# EAGLE board CT_schematic (EAGLE 7.6.0)

Size 100 x 80 mm. Coordinates in mm from the lower left corner, seen from the top.
Outline: 0,0 100,0 100,80 0,80 0,0
Copper layers (1*16): Top 0.035mm / dielectric 1.5mm / Bottom 0.035mm
Design rules "default": minimum track width 10mil, minimum drill 24mil, track to track 8mil, track to pad 8mil, pad to pad 8mil, via to via 8mil, smd to smd 8mil, copper to edge 40mil, drill to drill 8mil, minimum pad ring 10mil, minimum via ring 8mil, stop-mask expansion 4mil, vias tented up to drill 0mil, thermal gap 10mil

## Footprints (pad centres in the part's own frame; a part is rotated, then mirrored left to right if it is on the bottom)
C0603 = smd 0.8 x 0.8: 1 -0.762,0; 2 0.762,0
C0402 = smd 0.5 x 0.5: 1 -0.508,0; 2 0.508,0
C1210 = smd 1.2 x 2.5: 1 -1.524,0; 2 1.524,0
EXV-9H = smd 3.505 x 1.676: 1 -2.857,0; 2 2.857,0
L0603 = smd 0.8 x 0.8: 1 -0.762,0; 2 0.762,0
PJ-037B_PACKAGE = drill 3.7 square: 1 12,0 | drill 3.2 square: 2 6,0
R0603 = smd 0.8 x 0.8: 1 -0.762,0; 2 0.762,0
WLCSP64 = smd 0.34 x 0.34: A1 -1.75,1.75; A2 -1.25,1.75; A3 -0.75,1.75; A4 -0.25,1.75; A5 0.25,1.75; A6 0.75,1.75; A7 1.25,1.75; A8 1.75,1.75; B1 -1.75,1.25; B2 -1.25,1.25; B3 -0.75,1.25; B4 -0.25,1.25; B5 0.25,1.25; B6 0.75,1.25; B7 1.25,1.25; B8 1.75,1.25; C1 -1.75,0.75; C2 -1.25,0.75; C3 -0.75,0.75; C4 -0.25,0.75; C5 0.25,0.75; C6 0.75,0.75; C7 1.25,0.75; C8 1.75,0.75; D1 -1.75,0.25; D2 -1.25,0.25; D3 -0.75,0.25; D4 -0.25,0.25; D5 0.25,0.25; D6 0.75,0.25; D7 1.25,0.25; D8 1.75,0.25; E1 -1.75,-0.25; E2 -1.25,-0.25; E3 -0.75,-0.25; E4 -0.25,-0.25; E5 0.25,-0.25; E6 0.75,-0.25; E7 1.25,-0.25; E8 1.75,-0.25; F1 -1.75,-0.75; F2 -1.25,-0.75; F3 -0.75,-0.75; F4 -0.25,-0.75; F5 0.25,-0.75; F6 0.75,-0.75; F7 1.25,-0.75; F8 1.75,-0.75; G1 -1.75,-1.25; G2 -1.25,-1.25; G3 -0.75,-1.25; G4 -0.25,-1.25; G5 0.25,-1.25; G6 0.75,-1.25; G7 1.25,-1.25; G8 1.75,-1.25; H1 -1.75,-1.75; H2 -1.25,-1.75; H3 -0.75,-1.75; H4 -0.25,-1.75; H5 0.25,-1.75; H6 0.75,-1.75; H7 1.25,-1.75; H8 1.75,-1.75
SOIC-8 = smd 1.6 x 0.6: 1 -2.7,1.905 | smd 1.55 x 0.6: 2 -2.7,0.635; 3 -2.7,-0.635; 4 -2.7,-1.905; 5 2.7,-1.905; 6 2.7,-0.635; 7 2.7,0.635; 8 2.7,1.905
SAMTEC_FTSH-105-01-L-DV-K = smd 0.762 x 2.794: 1 -2.54,-2.032; 2 -2.54,2.032; 3 -1.27,-2.032; 4 -1.27,2.032; 5 0,-2.032; 6 0,2.032; 7 1.27,-2.032; 8 1.27,2.032; 9 2.54,-2.032; 10 2.54,2.032
TDFN-8/6MM = smd 0.3 x 0.75: 1 0,0; 2 0.5,0; 3 1,0; 4 1.5,0; 5 1.5,3; 6 1,3; 7 0.5,3; 8 0,3
FCI_10118193-0001LF = smd 0.4 x 1.35: 1 -1.3,2.675; 2 -0.65,2.675; 3 0,2.675; 4 0.65,2.675; 5 1.3,2.675 | smd 1.6 x 1.4: 6 -3.2,2.45; 7 3.2,2.45 | smd 1.9 x 1.9: 8 -1.2,0; 9 1.2,0 | hole 0.5: -3.3,0; 3.3,0
SOT143B = smd 1 x 0.7: 1 -0.75,-1 | smd 0.6 x 0.7: 2 0.95,-1; 3 0.95,1; 4 -0.95,1
ABS07-32.768KHZ-7-T = smd 1.1 x 2.4: 1 -2.5,0; 2 0,0
ASFL1 = smd 1.7 x 1.5: 1 -1.27,-1.1; 2 1.27,-1.1; 3 1.27,1.1; 4 -1.27,1.1
SOIC-8_EP = smd 1.6 x 0.533: 1 -2.921,1.905; 2 -2.921,0.635; 3 -2.921,-0.635; 4 -2.921,-1.905; 5 2.921,-1.905; 6 2.921,-0.635; 7 2.921,0.635; 8 2.921,1.905 | smd 2.54 x 3.302: EPAD 0,0 | drill 0.406 pad 0.406: P$1 -0.508,0.635; P$2 0.381,0.635; P$3 -0.508,-0.635; P$4 0.381,-0.635
SON-6 = smd 0.55 x 0.3: 1 -0.355,0.5 | smd 0.52 x 0.3: 2 -0.37,0; 3 -0.37,-0.5; 4 0.37,-0.5; 5 0.37,0; 6 0.37,0.5
SW_4-1437565-2 = smd 1.4 x 2.1: 1 -2.23,4.55; 2 -2.23,-4.55; 3 2.23,4.55; 4 2.23,-4.55
LGM67K-G1J2-24-Z = smd 0.8 x 1.4: A -2,0; C 0,0
NC7SZ125M5X = smd 1.3 x 0.7: 1 -1.3,0.95; 2 -1.3,0; 3 -1.3,-0.95; 4 1.3,-0.95; 5 1.3,0.95

## Placement (x,y rotation side)
C1  1e-06  [C0603]  -19.05,57.15 0 top  (outside the outline)
C2  1e-07  [C0603]  -22.86,57.15 0 top  (outside the outline)
C3  1e-07  [C0603]  -26.67,57.15 0 top  (outside the outline)
C4  1e-07  [C0603]  -30.48,57.15 0 top  (outside the outline)
C5  1e-07  [C0603]  -34.29,57.15 0 top  (outside the outline)
C6  1e-07  [C0603]  -38.1,57.15 0 top  (outside the outline)
C7  4.7e-06  [C0603]  -64.77,52.07 0 top  (outside the outline)
C8  2.2e-06  [C0603]  -15.24,57.15 0 top  (outside the outline)
C9  1e-08  [C0603]  -41.91,57.15 0 top  (outside the outline)
C10  1e-06  [C0603]  -45.72,57.15 0 top  (outside the outline)
C11  1e-11  [C0402]  -30.48,62.23 0 top  (outside the outline)
C12  1e-11  [C0402]  -34.29,62.23 0 top  (outside the outline)
C13  1e-06  [C0603]  -49.53,57.15 0 top  (outside the outline)
C14  1e-08  [C0402]  -38.1,62.23 0 top  (outside the outline)
C15  1e-07  [C0402]  -41.91,62.23 0 top  (outside the outline)
C16  1e-08  [C0402]  -45.72,62.23 0 top  (outside the outline)
C17  1e-08  [C0402]  -49.53,62.23 0 top  (outside the outline)
C18  1e-05  [C1210]  -16.51,46.99 0 top  (outside the outline)
C19  1e-05  [C1210]  -22.86,46.99 0 top  (outside the outline)
C20  1e-05  [C1210]  -29.21,46.99 0 top  (outside the outline)
C21  1e-05  [C1210]  -35.56,46.99 0 top  (outside the outline)
C22  1e-07  [C0402]  -53.34,62.23 0 top  (outside the outline)
C23  0.0001  [EXV-9H]  -60.96,30.48 0 top  (outside the outline)
C24  0.0001  [EXV-9H]  -17.78,39.37 0 top  (outside the outline)
C25  1e-08  [C0402]  -57.15,62.23 0 top  (outside the outline)
C26  1e-08  [C0402]  -60.96,62.23 0 top  (outside the outline)
F1  240.0  [L0603]  -53.34,57.15 0 top  (outside the outline)
J1  PJ-037B  [PJ-037B_PACKAGE]  -57.15,7.62 0 top  (outside the outline)
R2  1000.0  [R0603]  -57.15,57.15 0 top  (outside the outline)
R4  4700.0  [R0603]  -60.96,57.15 0 top  (outside the outline)
R5  2200.0  [R0603]  -64.77,57.15 0 top  (outside the outline)
R6  2200.0  [R0603]  -15.24,62.23 0 top  (outside the outline)
R7  10000.0  [R0603]  -15.24,52.07 0 top  (outside the outline)
R8  10000.0  [R0603]  -20.32,52.07 0 top  (outside the outline)
R9  10000.0  [R0603]  -25.4,52.07 0 top  (outside the outline)
R10  10000.0  [R0603]  -30.48,52.07 0 top  (outside the outline)
R11  10000.0  [R0603]  -35.56,52.07 0 top  (outside the outline)
R12  10000.0  [R0603]  -40.64,52.07 0 top  (outside the outline)
R13  10000.0  [R0603]  -45.72,52.07 0 top  (outside the outline)
R14  10000.0  [R0603]  -50.8,52.07 0 top  (outside the outline)
R15  5.0  [R0603]  -19.05,62.23 0 top  (outside the outline)
R16  4031.5447154472  [R0603]  -57.15,45.72 0 top  (outside the outline)
R17  2200.0  [R0603]  -22.86,62.23 0 top  (outside the outline)
R18  10000.0  [R0603]  -55.88,52.07 0 top  (outside the outline)
R19  10000.0  [R0603]  -60.96,52.07 0 top  (outside the outline)
R20  9100.0  [R0603]  -26.67,62.23 0 top  (outside the outline)
R21  680000.0  [R0603]  -62.23,45.72 0 top  (outside the outline)
R22  120000.0  [R0603]  -67.31,45.72 0 top  (outside the outline)
U1  STM32F412RGY6  [WLCSP64]  -41.91,30.48 0 top  (outside the outline)
U2  AT25320B-SSHL-T  [SOIC-8]  -57.15,19.05 0 top  (outside the outline)
U3  FTSH-105-01-L-DV-K  [SAMTEC_FTSH-105-01-L-DV-K]  -35.56,7.62 0 top  (outside the outline)
U4  24AA04-I/MC  [TDFN-8/6MM]  -41.91,19.05 0 top  (outside the outline)
U5  10118193-0001LF  [FCI_10118193-0001LF]  -50.8,30.48 0 top  (outside the outline)
U6  prtr5v0u2ax  [SOT143B]  -24.13,67.31 0 top  (outside the outline)
U7  ABS07-32.768KHZ-7-T  [ABS07-32.768KHZ-7-T]  -39.37,39.37 0 top  (outside the outline)
U8  ASFL1-25MHZ-NCS  [ASFL1]  -26.67,30.48 0 top  (outside the outline)
U9  MIC5234YME  [SOIC-8_EP]  -48.26,39.37 0 top  (outside the outline)
U10  TPS3895ADRYR  [SON-6]  -27.94,66.04 0 top  (outside the outline)
U11  4-1437565-2  [SW_4-1437565-2]  -27.94,20.32 0 top  (outside the outline)
U12  Q65110A2395  [LGM67K-G1J2-24-Z]  -57.15,39.37 0 top  (outside the outline)
U13  nc7sz125m5x  [NC7SZ125M5X]  -40.64,45.72 0 top  (outside the outline)
U14  nc7sz125m5x  [NC7SZ125M5X]  -46.99,45.72 0 top  (outside the outline)

## Library data of the parts
C1-C26 F1 J1 R2 R4-R22 U1-U14 = circuit_tree

## Nets
CLK_CRYSTAL_U1_C7: C11.1 U1.C7 U7.1
CLK_CRYSTAL_U1_C8: C12.1 U1.C8 U7.2
CLK_U1_D8: U1.D8 U8.3
GND: C1.2 C2.2 C3.2 C4.2 C5.2 C6.2 C7.2 C8.2 C9.2 C10.2 C11.2 C12.2 C13.2 C14.2 C15.2 C16.2 C17.2 C18.2 C19.2 C20.2 C21.2 C22.2 C23.2 C24.2 C25.2 C26.2 J1.2 R2.2 R7.2 R8.2 R15.2 R17.2 R20.2 R22.2 U1.A7 U1.B1 U1.D3 U1.G8 U1.H2 U2.4 U3.3 U3.5 U4.4 U4.7 U5.5 U5.6 U5.7 U5.8 U5.9 U6.1 U8.2 U9.7 U9.EPAD U10.2 U12.C U13.2 U13.3 U14.1 U14.3
NET_U1_A6: R6.1 U1.A6 U4.5
NET_U1_B5: R5.1 U1.B5 U4.6
NET_U1_C6: R8.1 U1.C6
NET_U1_D4: R7.1 U1.D4
NET_U1_D7: R4.1 U1.D7 U14.4
NET_U1_F7: C9.1 C10.1 F1.1 U1.F7
NET_U1_H3: C8.1 U1.H3
NET_U1_H6: U12.A
NET_U1_H8: U11.3 U11.4
NET_U2_3: R9.1 U2.3
NET_U2_7: R11.1 U2.7
NET_U3_9: R15.1 U3.9
NET_U9_4: R16.2 R17.1 U9.4
NET_U10_1: R19.1 R20.1 U10.1
NET_U10_3: R21.2 R22.1 U10.3
NET_U10_4: R18.1 U10.4 U13.4 U14.2
NET_U11_1: R2.1 U11.1 U11.2
PROC_SPI1_MISO: U1.B4 U2.2
PROC_SPI1_MOSI: U1.C4 U2.5
PROC_SPI1_NSS: R10.1 U1.A2 U2.1
PROC_SPI1_SCK: U1.F5 U2.6
PROC_SYS_JTCK_SWCLK: R13.1 U1.B2 U3.4
PROC_SYS_JTDO_SWO: U1.A5 U3.6
PROC_SYS_JTMS_SWDIO: R14.1 U1.C2 U3.2
PROC_USB_OTG_FS_DM: U1.D3 U5.2 U6.3
PROC_USB_OTG_FS_DP: U1.C1 U5.3 U6.2
PROC_USB_OTG_FS_VBUS: C13.1 U1.D1 U5.1 U6.4
RST_OUT_U3_JTAG_RST_B: R12.1 U3.10 U13.1
VCC_S1_10V4: C18.1 C19.1 C23.1 C24.1 J1.1 U9.5 U9.8
VCC_TIER1_3V3: C1.1 C2.1 C3.1 C4.1 C5.1 C6.1 C7.1 C14.1 C15.1 C16.1 C17.1 C20.1 C21.1 C22.1 C25.1 C26.1 F1.2 R4.2 R5.2 R6.2 R9.2 R10.2 R11.2 R12.2 R13.2 R14.2 R16.1 R18.2 R19.2 R21.1 U1.A1 U1.A8 U1.B7 U1.H1 U1.H7 U2.8 U3.1 U4.8 U8.4 U9.1 U10.6 U13.5 U14.5

## Tracks (layer width: path | path; a pad name or v marks a point on that pad's centre or on a via)
CLK_CRYSTAL_U1_C7  (2 unrouted)
CLK_CRYSTAL_U1_C8  (2 unrouted)
CLK_U1_D8  (1 unrouted)
GND  (58 unrouted)
NET_U1_A6  (2 unrouted)
NET_U1_B5  (2 unrouted)
NET_U1_C6  (1 unrouted)
NET_U1_D4  (1 unrouted)
NET_U1_D7  (2 unrouted)
NET_U1_F7  (3 unrouted)
NET_U1_H3  (1 unrouted)
NET_U1_H8  (1 unrouted)
NET_U2_3  (1 unrouted)
NET_U2_7  (1 unrouted)
NET_U3_9  (1 unrouted)
NET_U9_4  (2 unrouted)
NET_U10_1  (2 unrouted)
NET_U10_3  (2 unrouted)
NET_U10_4  (3 unrouted)
NET_U11_1  (2 unrouted)
PROC_SPI1_MISO  (1 unrouted)
PROC_SPI1_MOSI  (1 unrouted)
PROC_SPI1_NSS  (2 unrouted)
PROC_SPI1_SCK  (1 unrouted)
PROC_SYS_JTCK_SWCLK  (2 unrouted)
PROC_SYS_JTDO_SWO  (1 unrouted)
PROC_SYS_JTMS_SWDIO  (2 unrouted)
PROC_USB_OTG_FS_DM  (2 unrouted)
PROC_USB_OTG_FS_DP  (2 unrouted)
PROC_USB_OTG_FS_VBUS  (3 unrouted)
RST_OUT_U3_JTAG_RST_B  (2 unrouted)
VCC_S1_10V4  (6 unrouted)
VCC_TIER1_3V3  (42 unrouted)